# Altium PCB EST_MainV20.PcbDoc (part 8 of 8)
Units mm, origin at the board's own origin, x right, y up, seen from the top; angles counter-clockwise.
Board outline 69.72 x 115.32 mm, 2 copper layers (Top Layer, Bottom Layer); 330 components, 239 nets, 1066 pads, 416 vias.
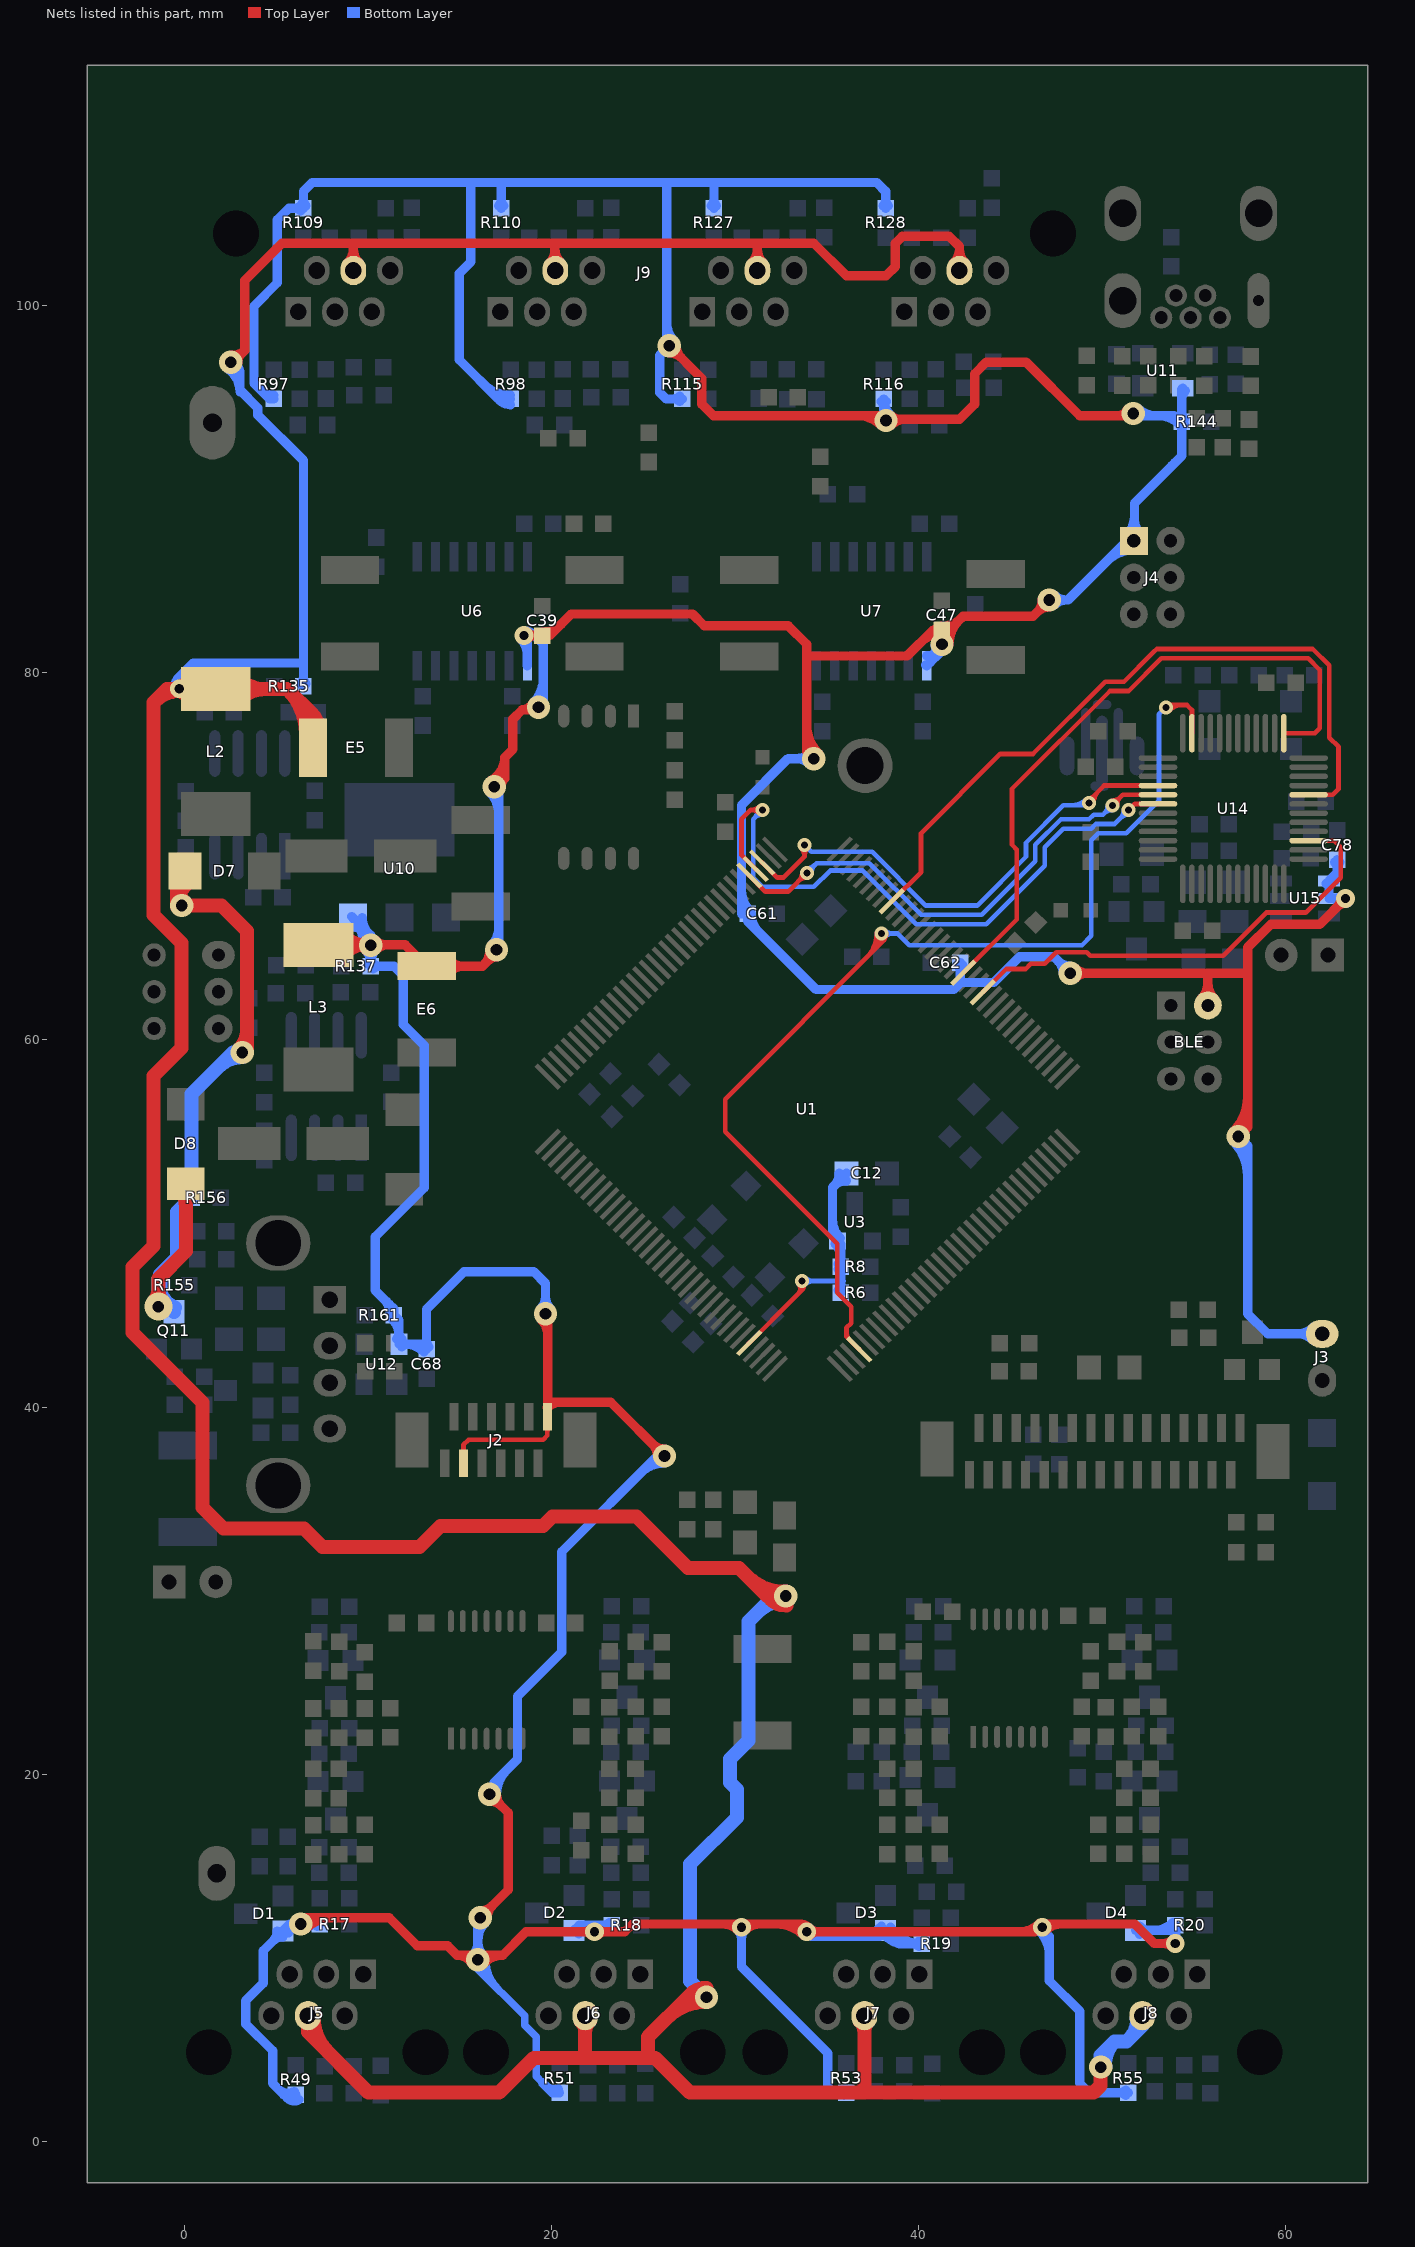
[diagram p8: the nets of this part, all layers, seen from the top]

## Via types
v1: diameter 0.762, hole 0.381, Top Layer to Bottom Layer, 258 vias
v2: diameter 1.27, hole 0.635, Top Layer to Bottom Layer, 91 vias
v3: diameter 1.016, hole 0.508, Top Layer to Bottom Layer, 66 vias
v4: diameter 1.524, hole 0.635, Top Layer to Bottom Layer, 1 vias

## Nets (pads, with @x,y where several pads share a name; then routed paths per layer and width w, separated by ;. In a path a pad name is that pad's centre, name@x,y a point inside that pad or via, vN(x,y) a via of type N, cw(c..) or ccw(c..) an arc to the next point about the centre after c; other vN are vias at no path point) (continued)
VCC: BLE.2 C39.1 C47.1 C61.2 C62.2 C68.1 C78.2 D1.3 D2.3 D3.3 D4.3 E6.1 J2.1 J2.10 J3.1 J4.1 L3.2 R17.1 R18.1 R19.1 R20.1 R49.1 R51.1 R53.1 R55.1 R97.2 R98.2 R109.1 R110.1 R115.2 R116.2 R127.1 R128.1 R137.2 R144.2 R161.1 U6.1 U7.1 U10.3 U11.4 U12.4 U15.4 U15.5 | length 639.1
  Top Layer w0.254: J2.10@15.128,37.519 ccw(c14.918,37.729) 15.215,37.729 ccw(c15.512,37.729) J2.10@15.302,37.519 ; J2.10@15.215,36.932 15.215,37.948 15.494,38.227 19.558,38.227 19.787,38.456 J2.1@19.787,39.472 ; J2.1@19.7,38.885 cw(c19.49,38.675) 19.787,38.675 cw(c20.084,38.675) J2.1@19.874,38.885
  Top Layer w0.406: J2.1@19.787,38.964 J2.1@19.787,39.472 19.787,40.234 19.812,40.259
  Top Layer w0.508: v2(6.35,11.855) 6.687,12.192 11.176,12.192 12.7,10.668 14.351,10.668 14.859,10.16 ; v2@6.619,11.586 cw(c8.083,10.122) 8.083,12.192 ; L3.2@7.315,65.173 12.043,65.173 E6.1@13.208,64.008 16.256,64.008 17.018,64.77 v2(17.018,64.897) ; L3.2@8.684,64.504 cw(c10.299,62.889) 10.299,65.173 cw(c10.299,67.457) L3.2@8.684,65.842 ; L3.2@9.187,65.173 cw(c9.187,64.179) v2@9.89,64.882 ; 9.293,65.173 ccw(c9.293,66.018) v2@9.89,65.42 ; v2@10.429,64.882 cw(c11.132,64.179) 11.132,65.173 ; v2@10.429,65.42 ccw(c11.027,66.018) 11.027,65.173 ; 12.172,65.044 cw(c11.496,64.367) E6.1@12.382,64.008 ; E6.1@14.393,63.649 cw(c15.26,62.782) 15.26,64.008 cw(c15.26,65.234) E6.1@14.393,64.367 ; v2@15.679,9.705 ccw(c14.859,9.195) 14.859,10.16 ; v2(16.129,12.192) 17.653,13.716 17.653,17.907 v2@16.891,18.669 ; v2@16.129,12.573 ccw(c16.129,13.493) 16.779,12.842 ccw(c17.43,12.192) v2@16.51,12.192 ; v2@16.295,9.663 cw(c17.355,8.782) 17.355,10.16 ; 16.32,64.072 ccw(c15.551,64.841) v2@16.637,64.882 ; 16.584,64.336 cw(c17.018,63.903) v2@17.018,64.516 ; v2@16.637,18.542 cw(c16.637,17.622) 17.287,18.273 cw(c17.938,18.923) v2@17.018,18.923 ; v2@16.712,74.123 ccw(c16.044,75.374) 17.463,75.374 ; v2@16.951,73.675 ccw(c16.496,74.528) 17.462,74.528 ; v2@17.018,73.787 17.462,74.231 17.462,75.374 ; v3(18.514,82.014) C39.1@19.503,82.014 19.911,82.014 21.082,83.185 27.686,83.185 28.321,82.55 32.893,82.55 33.909,81.534 33.909,80.899 ; v3@18.693,81.834 cw(c19.127,81.4) 19.127,82.014 cw(c19.127,82.627) v3@18.693,82.193 ; v2@18.976,78.298 cw(c18.415,78.629) 18.415,77.978 ; v2@19.304,77.978 18.415,77.978 ; C39.1@19.365,81.875 ccw(c19.03,81.54) 19.03,82.014 ccw(c19.03,82.487) C39.1@19.365,82.152 ; v2@19.416,44.816 cw(c18.459,43.859) 19.812,43.859 ; C39.1@19.503,82.21 ccw(c19.503,83.666) 20.533,82.636 ; v2@19.558,44.958 19.812,44.704 19.812,40.259 23.241,40.259 v2(26.161,37.339) ; J2.1@19.784,39.974 cw(c20.471,39.287) 20.471,40.259 ; v3@22.172,11.25 ccw(c21.739,10.817) 21.739,11.43 ccw(c21.739,12.043) v3@22.172,11.61 ; v3@22.532,11.25 cw(c22.965,10.817) 22.965,11.43 cw(c22.965,12.043) v3@22.532,11.61 ; v2@25.78,37.339 ccw(c24.86,37.339) 25.51,37.99 ccw(c26.161,38.64) v2@26.161,37.72 ; v2@26.416,97.409 cw(c26.416,96.489) 27.066,97.14 cw(c27.717,97.79) v2@26.797,97.79 ; v2(26.416,97.79) 28.194,96.012 28.194,94.615 28.829,93.98 37.973,93.98 v2@38.164,93.789 ; 29.327,11.855 cw(c29.327,10.658) v3@30.173,11.504 ; v3@30.226,11.684 v3@30.353,11.557 ; v3@30.533,11.504 cw(c31.379,10.658) 31.379,11.855 ; 32.27,11.855 cw(c32.27,9.791) v3@33.729,11.25 ; 33.496,11.855 cw(c33.496,11.017) 34.089,11.61 ccw(c34.522,12.043) 34.522,11.43 ccw(c34.522,10.817) v3@34.089,11.25 ; 33.909,75.924 ccw(c34.903,75.924) v2@34.2,75.221 ; 33.909,77.151 ccw(c36.13,77.151) v2@34.559,75.58 ; 33.909,80.264 33.909,79.883 ; v2(34.29,75.311) 33.909,75.692 33.909,79.883 ; 34.544,80.899 34.925,80.899 ; 36.694,93.98 cw(c36.694,92.193) v2@37.958,93.457 ; v2@38.227,93.789 42.227,93.789 43.053,94.615 43.053,96.266 43.688,96.901 45.847,96.901 48.768,93.98 50.8,93.98 ; v2@38.496,93.457 cw(c39.299,92.654) 39.299,93.789 ; v2@38.496,93.995 ccw(c38.994,94.493) 38.994,93.789 ; 40.132,81.661 cw(c41.246,80.548) C47.1@41.246,82.122 ; 40.561,82.09 cw(c40.89,81.762) C47.1@41.14,82.153 ; v2@41.049,81.84 ccw(c40.717,82.289) C47.1@41.275,82.289 ; C47.1@41.103,82.183 ccw(c40.789,81.886) 40.789,82.318 ; C47.1@41.103,82.453 cw(c40.789,82.751) 40.789,82.318 ; C47.1@41.107,82.18 cw(c40.701,81.774) v2@41.275,81.774 ; C47.1@41.246,82.514 ccw(c41.246,84.032) 42.319,82.959 ; v2(41.275,81.534) C47.1@41.275,82.289 ; C47.1@41.304,82.26 cw(c40.859,81.815) v2@41.38,81.463 ; v2@41.501,81.84 cw(c41.833,82.289) C47.1@41.275,82.289 ; v2@41.603,81.727 cw(c42.022,81.974) C47.1@41.678,82.318 ; v2@41.656,81.534 cw(c43.496,81.534) 42.195,82.835 ; 45.51,11.43 ccw(c45.51,12.91) v3@46.556,11.864 ; v2@46.736,83.947 cw(c45.816,83.947) 46.467,83.297 cw(c47.117,82.646) v2@47.117,83.566 ; v3@46.916,11.504 cw(c47.762,10.658) 47.762,11.855 ; v2(47.117,83.947) 46.228,83.058 42.418,83.058 C47.1@41.678,82.318 ; v2(48.26,63.627) 57.912,63.627 ; v2@48.529,63.358 cw(c49.18,62.707) 49.18,63.627 cw(c49.18,64.547) v2@48.529,63.896 ; 49.149,93.98 50.8,93.98 ; v2@51.361,94.3 cw(c50.8,94.631) 50.8,93.98 ; v2@51.562,93.98 50.8,93.98 ; v3@53.795,10.615 ccw(c53.362,10.182) 53.362,10.795 ccw(c53.362,11.408) v3@53.795,10.975 ; v3(53.975,10.795) 52.832,10.795 51.772,11.855 46.736,11.855 46.311,11.43 v3(33.909,11.43) 33.484,11.855 24.428,11.855 24.003,11.43 v3(22.352,11.43) 18.625,11.43 17.355,10.16 ; BLE.2@55.387,62.234 ccw(c54.52,63.101) 55.746,63.101 ccw(c56.973,63.101) BLE.2@56.106,62.234 ; BLE.2@55.746,61.874 55.746,63.62 ; v2@57.135,55.006 ccw(c55.258,56.883) 57.912,56.883 ; v2(57.404,54.737) 57.912,55.245 57.912,63.627 ; v2@57.494,54.647 ccw(c56.484,55.657) 57.912,55.657 ; v3@62.992,67.691 cw(c62.379,67.691) 62.812,67.257 cw(c63.246,66.824) v3@63.246,67.437 ; v3(63.246,67.691) 61.849,66.294 59.182,66.294 57.912,65.024 57.912,63.627 ; 14.859,10.16 17.355,10.16 ; 17.462,75.374 17.907,75.819 17.907,77.47 18.415,77.978 ; 33.909,79.883 33.909,80.899 ; 33.909,80.899 34.925,80.899 ; 34.925,80.899 39.37,80.899 40.789,82.318 ; 40.789,82.318 C47.1@41.246,82.318 ; C47.1@41.246,82.318 C47.1@41.678,82.318 ; C47.1@41.246,82.318 C47.1@41.275,82.289
  Bottom Layer w0.406: v2@16.002,10.16 v2(16.002,9.906) 16.002,9.398 18.542,6.858 18.542,6.35 19.177,5.715 19.177,3.556 19.518,3.215 ; v2@16.027,9.906 ccw(c17.315,9.906) 16.405,8.995 ; v2@16.434,9.906 ccw(c18.703,9.906) 17.098,8.302
  Bottom Layer w0.508: 4.195,95.373 ccw(c4.877,96.056) R97.2@4.877,95.091 ; R97.2@4.877,94.895 4.673,94.895 3.81,95.758 3.81,99.949 5.08,101.219 5.08,103.505 ; D1.3@5.072,11.474 cw(c4.306,11.474) 4.848,10.932 cw(c5.39,10.39) D1.3@5.39,11.156 ; 5.08,104.394 5.08,103.505 ; 5.156,2.845 ccw(c5.648,3.337) R49.1@5.997,2.735 ; 5.623,2.378 ccw(c5.991,2.746) R49.1@6.252,2.295 ; D1.3@5.692,11.376 cw(c6.35,11.164) v2(6.35,11.855) ; R49.1@5.957,2.427 ccw(c5.622,2.092) 5.622,2.565 ccw(c5.622,3.039) R49.1@5.957,2.704 ; R49.1@6.096,2.565 5.436,2.565 4.826,3.175 4.826,4.953 3.365,6.413 3.365,7.683 4.318,8.636 4.318,10.402 D1.3@5.39,11.474 5.771,11.855 v2(6.35,11.855) ; R109.1@6.364,105.144 ccw(c6.03,104.81) 6.03,105.283 ccw(c6.03,105.756) 6.364,105.422 ccw(c6.03,105.756) 6.503,105.756 ccw(c6.976,105.756) R109.1@6.641,105.422 ; v2@6.619,11.586 cw(c7.27,10.935) 7.27,11.855 cw(c7.27,12.775) v2@6.619,12.125 ; R17.1@7.258,11.717 ccw(c6.923,11.382) 6.923,11.855 ccw(c6.923,12.328) R17.1@7.258,11.994 ; R17.1@7.397,11.855 v2(6.35,11.855) ; U10.3@9.132,66.712 cw(c7.571,65.151) v2@9.779,65.151 ; U10.3@9.195,66.142 cw(c9.195,64.915) 10.062,65.782 cw(c10.929,66.65) U10.3@9.703,66.65 ; U10.3@9.195,66.65 10.16,65.685 v2(10.16,65.151) R137.2@10.16,64.008 11.43,64.008 11.938,63.5 11.938,60.833 13.081,59.69 13.081,51.943 10.414,49.276 10.414,46.355 11.176,45.593 11.43,45.339 R161.1@11.43,45.008 11.709,44.729 U12.4@11.709,43.434 C68.1@13.204,43.434 ; v2@9.89,64.882 cw(c9.24,64.231) 10.16,64.231 cw(c11.08,64.231) v2@10.429,64.882 ; 9.999,65.845 cw(c9.305,65.151) v2@10.287,65.151 ; R137.2@10.021,64.147 ccw(c9.687,64.482) 10.16,64.482 ccw(c10.633,64.482) 10.298,64.147 ccw(c10.633,64.482) 10.633,64.008 ccw(c10.633,63.535) R137.2@10.298,63.87 ; 10.862,45.907 cw(c9.963,45.008) R161.1@11.234,45.008 ; R161.1@11.292,44.87 cw(c10.283,43.861) U12.4@11.709,43.861 ; U12.4@11.566,43.705 ccw(c11.219,44.052) 11.709,44.052 ccw(c12.2,44.052) U12.4@11.853,43.705 ; U12.4@11.853,43.29 cw(c12.2,42.943) 12.2,43.434 cw(c12.2,43.925) U12.4@11.853,43.578 ; U12.4@12.019,43.434 cw(c12.019,41.954) C68.1@13.065,43 ; C68.1@13.065,43.278 ccw(c12.731,43.612) 13.204,43.612 ccw(c13.677,43.612) C68.1@13.343,43.278 ; C68.1@13.204,43.139 C68.1@13.204,43.434 ; v2@15.733,10.175 ccw(c15.082,10.826) 16.002,10.826 ccw(c16.922,10.826) v2@16.271,10.175 ; v2(16.002,9.906) v2@16.002,12.065 ; 16.002,10.966 cw(c17.355,10.966) v2@16.398,11.923 ; v2(16.129,12.192) v2@16.256,12.319 ; 16.317,95.697 ccw(c17.78,97.16) R98.2@17.78,95.091 ; v2@16.622,73.518 cw(c15.358,72.254) 17.145,72.254 ; v2@16.749,65.166 ccw(c15.792,66.123) 17.145,66.123 ; v2@16.891,18.669 16.891,19.558 18.161,20.828 18.161,24.257 20.574,26.67 20.574,32.131 25.782,37.339 v2(26.161,37.339) ; v2@17.018,18.923 cw(c18.858,18.923) 17.557,20.224 ; v2(17.018,64.897) 17.145,65.024 17.145,73.66 v2@17.018,73.787 ; R110.1@17.134,105.422 ccw(c16.799,105.756) 17.272,105.756 ccw(c17.746,105.756) R110.1@17.411,105.422 ; 17.185,94.829 ccw(c17.78,95.425) R98.2@17.78,94.583 ; R110.1@17.272,105.283 17.272,106.553 ; R98.2@17.642,94.756 ccw(c17.307,94.421) 17.307,94.895 ccw(c17.307,95.368) R98.2@17.642,95.033 ; R98.2@17.78,94.895 17.119,94.895 14.986,97.028 14.986,101.727 15.621,102.362 15.621,106.68 ; v3@18.334,81.834 cw(c17.464,80.964) U6.1@18.694,80.964 ; v3@18.502,82.267 cw(c18.535,81.57) 19.028,82.064 ; v3(18.514,82.014) 19.078,82.014 19.558,81.534 v2@19.558,77.978 ; U6.1@18.694,80.366 v3@18.694,81.833 ; v2@19.035,78.374 ccw(c17.771,79.638) 19.558,79.638 ; v2@19.416,45.354 ccw(c18.765,46.005) 19.685,46.005 ccw(c20.605,46.005) v2@19.954,45.354 ; 19.518,3.215 20.066,2.667 R51.1@20.447,2.667 ; v2(19.685,45.085) 19.685,46.736 19.05,47.371 15.621,47.371 15.24,47.371 13.204,45.335 C68.1@13.204,43.434 ; 19.708,3.025 ccw(c20.191,3.507) R51.1@20.389,2.854 ; D2.3@21.234,11.506 D2.3@21.514,11.786 ; D2.3@21.498,11.33 cw(c22.352,10.759) v3@22.352,11.786 ; v3@22.11,11.352 ccw(c21.514,11.16) D2.3@21.514,11.786 ; v3@22.584,11.327 cw(c23.292,11.011) R18.1@23.292,11.786 v3@22.352,11.786 ; R18.1@23.153,11.647 ccw(c22.819,11.313) 22.819,11.786 ccw(c22.819,12.259) R18.1@23.153,11.925 ; 24.865,36.422 cw(c26.161,35.126) v2@26.161,36.958 ; 26.289,99.016 ccw(c27.642,99.016) v2@26.685,98.059 ; 26.289,106.426 26.289,97.917 v2(26.416,97.79) 25.908,97.282 25.908,95.25 26.263,94.895 R115.2@27.128,94.895 ; R115.2@26.989,94.756 ccw(c26.654,94.421) 26.654,94.895 ccw(c26.654,95.368) R115.2@26.989,95.033 ; R127.1@28.716,105.422 ccw(c28.382,105.756) 28.855,105.756 ccw(c29.328,105.756) R127.1@28.993,105.422 ; R127.1@28.855,105.283 28.855,106.654 ; v3@30.173,11.504 cw(c29.74,11.071) 30.353,11.071 cw(c30.966,11.071) v3@30.533,11.504 ; v3@30.353,11.557 30.353,9.525 35.052,4.826 35.052,2.921 35.306,2.667 R53.1@36.068,2.667 ; C61.2@30.353,66.857 30.353,69.088 ; 30.353,68.135 ccw(c31.964,68.135) C61.2@30.825,66.995 ; 30.353,69.723 30.353,69.088 ; C61.2@30.686,66.857 30.686,66.469 34.417,62.738 41.91,62.738 42.262,63.09 42.262,63.119 ; C61.2@30.882,66.857 ccw(c32.293,66.857) 31.295,65.86 ; v3(33.909,11.43) 34.163,11.176 37.871,11.176 D3.3@38.202,11.506 38.938,10.77 R19.1@40.157,10.77 cw(c40.157,12.794) D3.3@38.467,11.681 ; v2@33.909,75.311 32.893,75.311 30.353,72.771 30.353,69.088 ; v2@34.021,75.042 ccw(c33.37,74.391) 33.37,75.311 ccw(c33.37,76.231) v2@34.021,75.58 ; v3@34.089,11.61 ccw(c35.135,12.656) 35.135,11.176 ; R53.1@35.929,2.528 ccw(c35.594,2.194) 35.594,2.667 ccw(c35.594,3.14) R53.1@35.929,2.806 ; 36.638,11.176 ccw(c36.638,13.07) D3.3@37.977,11.731 ; R116.2@37.962,94.756 cw(c37.627,94.421) 38.1,94.421 cw(c38.574,94.421) R116.2@38.239,94.756 ; D3.3@38.043,11.401 ccw(c39.214,12.173) 39.214,10.77 ; R128.1@38.063,105.422 ccw(c37.729,105.756) 38.202,105.756 ccw(c38.675,105.756) R128.1@38.341,105.422 ; v2@38.1,93.853 R116.2@38.1,94.895 ccw(c39.318,94.895) v2@38.487,94.004 ; D3.3@38.202,11.189 cw(c38.202,10.422) 38.744,10.964 cw(c39.286,11.506) D3.3@38.519,11.506 ; R128.1@38.202,105.283 38.202,106.197 37.719,106.68 15.621,106.68 ; R19.1@40.019,10.631 ccw(c39.684,10.297) 39.684,10.77 ccw(c39.684,11.243) R19.1@40.019,10.909 ; U7.1@40.378,80.407 ccw(c40.4,80.593) U7.1@40.532,80.46 ; U7.1@40.437,80.366 v2@41.275,81.204 ; U7.1@40.436,80.912 ccw(c40.553,81.925) v2@41.275,81.204 ; U7.1@40.602,80.531 ccw(c39.846,81.287) v2@40.9,81.469 ; v2@41.25,81.509 v2(41.275,81.534) v2@41.275,81.204 ; C62.2@42.124,64.069 cw(c41.789,63.734) 42.262,63.734 cw(c42.736,63.734) C62.2@42.401,64.069 ; C62.2@42.262,64.207 42.262,63.119 ; v3@46.556,11.504 cw(c45.203,10.151) 47.117,10.151 ; v3@46.736,11.557 47.117,11.176 47.117,8.763 48.768,7.112 48.768,3.175 49.276,2.667 R55.1@51.409,2.667 ; v2(47.117,83.947) 48.133,83.947 51.753,87.566 51.753,89.218 53.785,91.249 ; v2@47.386,83.678 cw(c48.037,83.027) 48.037,83.947 cw(c48.037,84.867) v2@47.386,84.216 ; v2@47.879,63.627 ccw(c46.959,63.627) 47.61,64.277 ccw(c48.26,64.928) v2@48.26,64.008 ; v2(48.26,63.627) 47.371,64.516 45.488,64.516 44.091,63.119 42.262,63.119 ; 50.24,86.054 cw(c51.714,84.58) J4.1@51.714,86.665 ; R55.1@51.271,2.528 ccw(c50.936,2.194) 50.936,2.667 ccw(c50.936,3.14) R55.1@51.271,2.806 ; J4.1@51.355,87.532 ccw(c50.396,88.491) 51.753,88.491 ; v2@51.689,93.98 53.9,93.98 54.228,93.652 R144.2@54.335,93.652 ; 51.753,88.307 ccw(c52.849,88.307) J4.1@52.074,87.532 ; D4.3@51.816,11.506 53.695,11.506 R20.1@53.975,11.786 v3(53.975,10.795) ; v2@51.958,94.376 ccw(c52.915,95.333) 52.915,93.98 ; D4.3@52.041,11.282 cw(c52.583,10.74) 52.583,11.506 cw(c52.583,12.273) D4.3@52.041,11.731 ; 52.826,11.506 ccw(c52.826,12.935) R20.1@53.836,11.925 ; 53.071,93.98 cw(c53.071,92.388) 54.196,93.514 cw(c53.862,93.179) 54.335,93.179 cw(c54.808,93.179) R144.2@54.473,93.514 ; v3@53.795,10.975 ccw(c53.362,11.408) 53.975,11.408 ccw(c54.588,11.408) v3@54.155,10.975 ; R20.1@53.836,11.647 cw(c53.502,11.313) 53.975,11.313 cw(c54.448,11.313) R20.1@54.114,11.647 ; 53.954,91.419 53.785,91.249 ; R144.2@54.196,93.791 ccw(c53.862,94.126) 54.335,94.126 ccw(c54.808,94.126) R144.2@54.473,93.791 ; R144.2@54.281,93.599 R144.2@54.335,93.652 ; R144.2@54.335,93.856 54.335,95.432 U11.4@54.381,95.479 ; 54.335,94.876 cw(c54.984,94.876) U11.4@54.525,95.335 ; v2@57.135,54.468 cw(c55.258,52.591) 57.912,52.591 ; v2(57.404,54.737) 57.912,54.229 57.912,48.768 ; v2@57.494,54.827 cw(c56.484,53.817) 57.912,53.817 ; 57.912,49.479 57.912,48.768 ; J3.1@61.49,43.634 ccw(c60.623,42.766) 60.623,43.993 ccw(c60.623,45.219) J3.1@61.49,44.352 ; J3.1@61.874,43.993 59.004,43.993 57.912,45.085 57.912,48.768 ; U15.4@62.203,68.503 cw(c62.215,68.507) U15.4@62.206,68.517 ; U15.5@62.608,67.701 cw(c62.608,67.053) v3@63.066,67.511 ; U15.4@62.608,68.684 ccw(c62.182,69.11) 62.785,69.11 ; U15.4@62.609,68.684 ccw(c62.217,69.095) 62.785,69.095 ; C78.2@62.646,69.664 cw(c62.312,69.329) 62.785,69.329 cw(c63.258,69.329) C78.2@62.923,69.664 ; U15.5@62.651,67.656 cw(c62.823,66.927) v3@63.353,67.457 ; U15.5@62.652,67.657 cw(c62.831,66.956) v3@63.343,67.467 ; U15.5@62.657,67.701 ccw(c62.657,68.28) v3@63.066,67.871 ; U15.4@62.684,68.666 cw(c63.08,68.8) 62.785,69.095 ; C78.2@62.785,69.802 62.785,69.095 ; v3@63.119,67.691 63.109,67.701 U15.5@62.341,67.701 U15.4@62.341,68.651 62.785,69.095 ; 5.08,103.505 5.08,104.648 5.715,105.283 R109.1@6.503,105.283 6.503,106.198 6.985,106.68 15.621,106.68 ; D2.3@21.514,11.786 v3@22.352,11.786 ; 53.785,91.249 54.335,91.8 R144.2@54.335,93.652 ; 11.011,45.758 cw(c10.435,45.182) 11.237,45.042 ccw(c10.435,45.182) 11.011,45.758
  other v2: 16.637,18.923 16.891,73.787 19.304,78.105 38.227,93.726 51.689,94.107
  other v3: 30.353,11.684 46.736,11.684
VCCEXT: E5.1 J5.4 J6.4 J7.4 J8.4 J9.4 J9.10 J9.16 J9.22 L2.2 R135.2 | length 316.3
  Top Layer w0.508: v2(2.54,96.901) 2.667,96.901 3.302,97.536 ; v2@2.58,97.28 ccw(c2.672,98.166) 3.302,97.536 ; v2@2.921,96.901 cw(c3.534,96.901) 3.101,97.335 ; 5.052,103.096 4.826,102.87 ; J9.4@8.906,102.305 ccw(c8.144,103.066) 9.221,103.066 ccw(c10.298,103.066) J9.4@9.536,102.305 ; J9.4@9.221,101.89 9.221,103.328 ; J9.10@19.906,102.305 ccw(c19.212,102.999) 20.193,102.999 ; J9.10@20.193,101.727 20.193,103.087 ccw(c21.255,103.087) J9.10@20.527,102.314 ; J9.16@30.906,102.305 ccw(c30.144,103.066) 31.221,103.066 ccw(c32.298,103.066) J9.16@31.536,102.305 ; J9.16@31.221,101.89 31.221,103.357 ; J9.22@41.906,102.305 ccw(c41.144,103.066) 42.221,103.066 ccw(c43.298,103.066) J9.22@42.536,102.305 ; J9.22@42.221,101.89 42.221,103.194 41.656,103.759 39.116,103.759 38.735,103.378 38.735,102.108 38.227,101.6 36.068,101.6 34.29,103.378 5.334,103.378 4.826,102.87 ; 3.302,97.536 3.302,101.346 4.826,102.87
  Top Layer w0.762: -1.555,78.455 cw(c-0.254,77.154) v3@-0.254,78.994 ; -1.235,78.775 cw(c-0.58,78.119) v3@-0.293,79 ; L2.2@0.441,78.52 ccw(c-0.918,77.192) -0.918,79.092 ; L2.2@0.441,79.664 cw(c-0.918,80.992) -0.918,79.092 ; 1.016,37.084 1.016,36.068 ; L2.2@3.006,78.513 cw(c4.404,77.115) 4.404,79.092 cw(c4.404,81.069) L2.2@3.006,79.671 ; 5.669,79.04 cw(c3.349,76.721) E5.1@6.629,76.721 ; E5.1@6.741,76.99 ccw(c6.091,77.641) 7.01,77.641 ccw(c7.93,77.641) E5.1@7.28,76.99 ; J5.4@6.746,6.87 6.746,5.969 10.048,2.667 17.145,2.667 19.05,4.572 21.846,4.572 ; 6.969,77.74 cw(c5.95,76.721) E5.1@7.391,76.721 ; E5.1@7.01,75.895 7.01,77.699 5.617,79.092 3.937,79.092 ; J5.4@7.065,6.77 ccw(c9.768,6.77) 7.857,4.858 ; 21.465,4.572 21.846,4.572 ; J6.4@21.62,6.544 cw(c21.076,6) 21.846,6 cw(c22.616,6) J6.4@22.072,6.544 ; J6.4@21.844,6.868 J6.4@21.846,6.87 21.846,4.572 ; 26.28,6.722 cw(c28.448,4.554) v2@28.448,7.62 ; 26.924,7.366 cw(c27.839,6.451) v2@28.348,7.641 ; 27.581,8.023 cw(c28.448,7.156) v2@28.448,8.382 ; v2(28.448,7.874) 27.432,7.874 25.273,5.715 25.273,4.572 ; 30.734,30.734 ccw(c32.587,32.587) v2@32.75,29.972 ; 31.928,29.54 ccw(c32.727,30.339) v2@32.798,29.211 ; v2(32.766,29.718) 31.75,29.718 30.226,31.242 27.432,31.242 24.638,34.036 20.066,34.036 19.558,33.528 13.97,33.528 12.827,32.385 7.546,32.385 6.53,33.401 2.159,33.401 1.016,34.544 1.016,36.068 ; J7.4@36.82,6.544 cw(c36.276,6) 37.046,6 cw(c37.816,6) J7.4@37.272,6.544 ; 37.046,2.705 37.046,5.08 ; 37.046,3.467 37.046,5.08 ; J7.4@37.046,6.87 37.046,5.08 ; v2(49.911,4.064) 49.911,3.048 49.53,2.667 27.559,2.667 25.654,4.572 25.273,4.572 ; -0.918,79.092 -1.651,78.359 -1.651,66.802 -0.127,65.278 -0.127,59.563 -1.651,58.039 -1.651,48.768 -2.794,47.625 -2.794,44.069 1.016,40.259 1.016,36.068 ; -0.918,79.092 L2.2@1.727,79.092 3.937,79.092 ; 3.937,79.092 cw(c3.937,80.074) 3.114,79.539 ccw(c3.937,80.074) 3.937,79.092 ; 3.937,79.092 ccw(c3.937,78.11) 3.114,78.645 cw(c3.937,78.11) 3.937,79.092 ; 21.846,4.572 25.273,4.572
  Bottom Layer w0.508: v3@-0.507,79.101 cw(c0.302,79.164) -0.272,79.738 ; v3@-0.434,79.301 ccw(c-0.867,79.734) -0.254,79.734 ccw(c0.359,79.734) v3@-0.074,79.301 ; v3@-0.254,79.326 -0.254,79.756 0.508,80.518 ; v3@-0.001,79.141 cw(c1.749,79.277) 0.508,80.518 ; v2@2.338,96.578 cw(c1.533,95.295) 3.048,95.295 ; v2(2.54,96.901) 3.048,96.393 3.048,95.377 4.021,94.404 4.021,94.023 6.502,91.542 6.502,80.518 ; v2@2.607,97.009 cw(c2.109,96.213) 3.048,96.213 ; R135.2@6.364,79.387 ccw(c6.029,79.722) 6.502,79.722 ccw(c6.975,79.722) R135.2@6.641,79.387 ; R135.2@6.502,79.248 6.502,80.518 ; 0.508,80.518 6.502,80.518
  Bottom Layer w0.762: v2(28.448,7.874) 27.559,8.763 27.559,15.113 30.099,17.653 30.099,19.177 29.718,19.558 29.718,20.828 30.734,21.844 30.734,23.622 ; 30.734,22.225 30.734,23.622 ; 30.734,25.527 30.734,25.146 ; 31.248,28.835 cw(c32.766,27.318) v2@32.766,29.464 ; v2(32.766,29.718) 32.131,29.718 30.734,28.321 30.734,25.146 ; v2(49.911,4.064) 49.911,4.699 50.673,5.461 ; v2@50.164,4.084 cw(c51.914,4.22) 50.673,5.461 ; 51.528,5.681 ccw(c50.686,6.523) J8.4@51.861,6.718 ; J8.4@52.176,6.87 52.176,6.329 51.308,5.461 50.673,5.461 ; 30.734,23.622 30.734,25.146
  other v3: -0.254,79.121
VIN: D7.1 D8.1 Q11.3 R155.2 R156.2 | length 53.1
  Top Layer w0.762: v4@-1.666,45.735 ccw(c-2.317,46.386) -1.397,46.386 ccw(c-0.477,46.386) v4@-1.128,45.735 ; v4(-1.397,45.466) -1.397,46.99 0.102,48.489 D8.1@0.102,52.172 ; v2@-0.381,67.258 cw(c1.314,67.258) D7.1@0.342,68.646 ; v2@-0.381,67.31 D7.1@-0.381,68.885 ; D7.1@-0.381,68.536 ccw(c1.099,68.536) v2@0.053,67.49 ; D8.1@-0.258,51.812 cw(c-1.125,50.945) 0.102,50.945 cw(c1.328,50.945) D8.1@0.461,51.812 ; v2(-0.127,67.31) 2.032,67.31 3.429,65.913 3.429,61.849 ; v2(3.175,59.309) 3.429,59.563 3.429,61.849 ; 3.429,59.944 3.429,61.849 ; v2@2.995,59.489 ccw(c1.949,60.535) 3.429,60.535 cw(c1.949,60.535) v2@2.995,59.489
  Bottom Layer w0.762: v4@-1.666,45.735 ccw(c-2.501,46.57) R155.2@-1.321,46.57 ; R155.2@-1.253,46.623 ccw(c-0.014,46.417) Q11.3@-0.902,45.529 ; R155.2@-1.252,46.634 cw(c0.305,46.634) -0.796,47.735 ; Q11.3@-0.559,45.187 -1.321,45.948 R155.2@-1.321,46.634 ; Q11.3@-0.491,45.428 cw(c-0.029,46.634) R155.2@-1.321,46.634 ; 1.874,58.516 cw(c3.175,57.215) v2@3.175,59.055 ; v2(3.175,59.309) 2.667,59.309 0.407,57.049 R156.2@0.407,51.409 -0.381,50.622 -0.381,48.149 -1.321,47.21 R155.2@-1.321,46.634
VREF: C12.2 R6.2 R8.2 U1.32 U3.3 | length 23.6
  Top Layer w0.254: U1.32@30.765,43.492 33.197,45.924 ; 33.438,46.165 ccw(c33.159,46.444) v1@33.461,46.699 ; 33.502,46.228 33.197,45.924 ; 33.634,46.36 ccw(c33.371,46.623) v1(33.655,46.863) 33.655,46.381 33.197,45.924
  Bottom Layer w0.254: v1(33.655,46.863) 35.763,46.863 35.916,46.863 ; v1@33.835,46.683 cw(c34.268,46.25) 34.268,46.863 cw(c34.268,47.476) v1@33.835,47.043
  Bottom Layer w0.508: 35.306,50.213 ccw(c36.751,50.213) U3.3@35.729,49.191 ; U3.3@35.442,48.904 cw(c34.665,48.127) 35.763,48.127 ; R8.2@35.625,47.511 cw(c35.29,47.177) 35.763,47.177 cw(c36.237,47.177) R8.2@35.902,47.511 ; R8.2@35.625,47.789 ccw(c35.29,48.123) 35.763,48.123 ccw(c36.237,48.123) R8.2@35.902,47.789 ; C12.2@35.68,52.729 cw(c34.724,52.729) 35.4,52.053 cw(c36.076,51.377) C12.2@36.076,52.333 ; R6.2@35.763,46.228 35.763,46.863 R8.2@35.763,47.65 35.763,48.869 35.306,49.327 35.306,51.958 C12.2@36.076,52.729 ; R6.2@35.625,46.366 ccw(c35.29,46.701) 35.763,46.701 ; R6.2@35.625,46.366 ccw(c35.29,46.701) 35.763,46.701 ; R6.2@35.625,46.366 ccw(c35.29,46.701) 35.763,46.701 ; 35.763,46.701 ccw(c36.237,46.701) R6.2@35.902,46.366 ; 35.763,46.701 ccw(c36.237,46.701) R6.2@35.902,46.366 ; 35.763,46.701 ccw(c36.237,46.701) R6.2@35.902,46.366
VS_CS: U1.40 U14.23 | length 65
  Top Layer w0.254: 36.068,44.074 ccw(c36.618,44.074) U1.40@36.229,43.685 ; U1.40@36.776,43.138 36.068,43.846 36.068,44.323 36.322,44.577 36.322,45.466 35.56,46.228 35.56,48.895 29.464,54.991 29.464,56.769 37.973,65.278 ; 37.18,64.485 ccw(c35.879,65.786) v1@37.719,65.786 ; 37.614,64.919 ccw(c36.747,65.786) v1(37.973,65.786) 37.973,65.278 ; v1@37.821,65.583 cw(c37.592,65.278) 37.973,65.278 ; 38.047,65.352 ccw(c37.614,65.786) v1@38.227,65.786 ; v1@38.125,65.583 ccw(c38.354,65.278) 37.973,65.278 ; v1(53.467,78.105) 53.594,78.232 54.61,78.232 54.883,77.959 U14.23@54.883,76.693 ; v1@53.647,77.925 cw(c54.387,77.185) 54.387,78.232
  Bottom Layer w0.254: v1(37.973,65.786) 38.862,65.786 39.497,65.151 48.895,65.151 49.403,65.659 49.403,70.866 49.784,71.247 51.308,71.247 53.086,73.025 53.086,77.724 v1(53.467,78.105) ; v1@38.153,65.606 cw(c38.586,65.173) 38.586,65.786 cw(c38.586,66.399) v1@38.153,65.966
VS_DREQ: U1.89 U14.13 | length 37.4
  Top Layer w0.254: U1.89@42.433,63.644 45.339,66.55 45.339,70.358 45.085,70.612 45.085,73.66 50.419,78.994 51.435,78.994 53.213,80.772 56.642,80.772 ; 56.896,80.772 56.642,80.772 ; U14.13@59.883,76.693 61.58,76.693 61.849,76.962 61.849,77.724 ; 61.849,77.089 61.849,77.724 ; 56.642,80.772 61.214,80.772 61.849,80.137 61.849,77.724
VS_MISO: U1.112 U14.30 | length 40.2
  Top Layer w0.254: 30.353,71.374 30.353,70.485 ; U1.112@31.119,69.301 30.353,70.067 30.353,70.485 ; v1@31.316,72.337 ccw(c30.883,71.904) 30.883,72.517 ccw(c30.883,73.13) v1@31.316,72.697 ; v1(31.496,72.517) 30.861,72.517 30.353,72.009 30.353,70.485 ; v1(51.435,72.517) 51.761,72.843 U14.30@53.033,72.843
  Bottom Layer w0.254: v1@31.242,72.517 cw(c30.629,72.517) 31.062,72.083 cw(c31.496,71.65) v1@31.496,72.263 ; v1(31.496,72.517) 30.988,72.009 30.988,68.834 31.496,68.326 33.147,68.326 ; 33.401,68.326 33.147,68.326 ; 36.449,69.215 35.687,69.215 ; v1@51.181,72.517 cw(c50.568,72.517) 51.001,72.083 cw(c51.435,71.65) v1@51.435,72.263 ; v1(51.435,72.517) 50.673,71.755 49.657,71.755 49.403,71.501 47.879,71.501 46.863,70.485 46.863,69.469 43.688,66.294 39.878,66.294 36.957,69.215 35.687,69.215 ; 33.147,68.326 34.29,68.326 35.179,69.215 35.687,69.215
VS_MOSI: U1.113 U14.29 | length 31.5
  Top Layer w0.254: U1.113@30.765,68.947 31.641,68.072 32.893,68.072 v1(33.909,69.088) ; v1@33.655,69.088 cw(c33.042,69.088) 33.475,68.654 cw(c33.909,68.221) v1@33.909,68.834 ; v1(50.546,72.771) 51.118,73.343 U14.29@53.033,73.343 ; v1@50.546,73.025 ccw(c50.546,73.638) 50.98,73.205 ccw(c51.413,72.771) v1@50.8,72.771
  Bottom Layer w0.254: v1(33.909,69.088) 34.442,69.621 37.313,69.621 40.132,66.802 43.434,66.802 46.355,69.723 46.355,70.612 47.752,72.009 49.276,72.009 49.53,72.263 50.038,72.263 v1(50.546,72.771) ; v1@33.909,69.342 ccw(c33.909,69.955) 34.343,69.522 ccw(c34.776,69.088) v1@34.163,69.088 ; v1@50.292,72.771 cw(c49.679,72.771) 50.112,72.337 cw(c50.546,71.904) v1@50.546,72.517
VS_RST: U1.100 U14.8 | length 40
  Top Layer w0.254: U1.100@38.544,67.533 40.132,69.122 40.132,71.247 44.45,75.565 46.228,75.565 50.165,79.502 51.181,79.502 52.705,81.026 ; 52.857,81.178 52.705,81.026 ; U14.8@61.233,73.343 62.548,73.343 62.865,73.66 62.865,75.946 62.357,76.454 62.357,80.391 61.468,81.28 52.959,81.28 52.705,81.026
VS_SCK: U1.111 U14.28 | length 30.3
  Top Layer w0.254: U1.111@31.472,69.654 32.293,68.834 32.639,68.834 33.782,69.977 v1(33.782,70.612) ; v1@33.602,70.432 cw(c33.169,69.999) 33.782,69.999 cw(c34.395,69.999) v1@33.962,70.432 ; v1@49.276,73.025 50.094,73.843 51.887,73.843 U14.28@53.033,73.843 ; v1@49.276,73.152 ccw(c49.276,73.459) 49.493,73.242 ; v1@49.53,72.898 cw(c50.45,72.898) 49.799,73.548
  Bottom Layer w0.254: v1(33.782,70.612) 34.163,70.231 37.465,70.231 40.386,67.31 43.18,67.31 45.847,69.977 45.847,70.739 47.879,72.771 49.022,72.771 v1@49.276,73.025 ; 48.356,72.771 ccw(c48.356,73.818) v1@49.096,73.078
  other v1: 49.276,72.898
VS_XDCS: U1.86 U14.3 | length 25.8
  Top Layer w0.254: U1.86@43.493,62.583 44.765,63.856 45.822,63.856 46.101,64.135 46.863,64.135 47.498,64.77 49.149,64.77 49.34,64.579 52.705,64.579 56.579,64.579 58.928,66.929 61.087,66.929 62.992,68.834 62.992,70.485 62.634,70.843 U14.3@61.233,70.843
pads on no net: J2.0 J4.6 J5.0 J6.0 J7.0 J8.0 J9.0 J11.1 J11.4 J11.5 J11.6 LCD1.0 LCD1.1 LCD1.2 LCD1.4 LCD1.6 LCD1.20 LCD1.30 U1.6 U1.122 U6.8 U7.8 U10.4 U14.1 U14.2 U14.9 U14.10 U14.11 U14.12 U14.15 U14.25 U14.27 U14.36 U14.39 U14.42 U14.48 USB1. Y1.3 Y1.4 Y2.3 Y2.4

## Polygon pours and split planes (outlines as drawn)
GND on Top Layer "Top Layer-No Net" (solid, remove dead copper, pour order 1000): 0.032,108.392 59.976,108.392 59.976,90.739 55.785,90.739 55.785,81.722 64.04,81.722 64.04,62.926 58.579,62.926 58.579,45.654 58.452,45.527 63.532,45.527 63.532,27.366 54.515,27.366 54.515,17.968 54.642,17.841 59.976,17.841 59.976,0.061 0.032,0.061 0.032,17.968 5.493,17.968 5.493,27.366 -3.524,27.366 -3.524,49.591 -3.397,49.718 -2.508,49.718 -2.508,81.722 4.35,81.722 4.35,90.612 4.223,90.739 0.032,90.739 0.032,108.392
GND on Bottom Layer "Top Layer-No Net" (solid, remove dead copper, pour order 1001): 0.021,108.686 60.092,108.686 60.092,91.033 59.965,90.906 55.774,90.906 55.774,81.889 64.029,81.889 64.029,63.22 63.902,63.093 58.568,63.093 58.568,45.694 63.521,45.694 63.521,27.533 54.631,27.533 54.631,18.008 60.092,18.008 60.092,0.228 0.021,0.228 0.021,18.008 0.148,18.135 5.482,18.135 5.482,27.533 -3.408,27.533 -3.408,49.758 -3.535,49.885 -2.519,49.885 -2.519,81.762 -2.392,81.889 4.212,81.889 4.212,90.652 4.339,90.779 4.212,90.906 0.021,90.906 0.021,108.559

## Keep-outs
Keep-Out Layer:
  circle w0.127: c14,91.25 r2.75
  circle w0.127: c30,91.25 r2.1
  circle w0.127: c46,91.25 r2.75
  circle w0.127: c46,16.2 r2.75
  circle w0.127: c35,16.2 r2.1
  circle w0.127: c14,16.2 r2.75
  lines w0.127: -3.532,28.805 ccw(c-2.032,28.805) -2.032,27.305 ; -3.5,48.85 -3.5,49.65 ; -2.54,80.264 cw(c-1.04,80.264) -1.04,81.764 ; 0,16.383 cw(c1.5,16.383) 1.5,17.883 ; 0,106.934 cw(c1.5,106.934) 1.5,108.434 ; 0.024,1.5 ccw(c1.524,1.5) 1.524,0 ; 0.024,92.178 ccw(c1.524,92.178) 1.524,90.678 ; 58.444,0.024 ccw(c58.444,1.524) 59.944,1.524 ; 58.547,17.907 cw(c58.547,16.407) 60.047,16.407 ; 58.571,108.434 cw(c58.571,106.934) 60.071,106.934 ; 62,27.329 ccw(c62,28.829) 63.5,28.829 ; 62.103,45.466 cw(c62.103,43.966) 63.603,43.966 ; 62.484,81.661 cw(c62.484,80.161) 63.984,80.161 ; 62.508,62.889 ccw(c62.508,64.389) 64.008,64.389 ; -3.5,49.65 -2.5,49.65 -2.5,81.65 4.25,81.65 4.25,90.65 0,90.65 0,108.4 60,108.4 60,90.65 55.75,90.65 55.75,81.65 64,81.65 64,62.95 58.5,62.95 58.5,45.45 63.5,45.45 63.5,27.35 54.55,27.35 54.55,17.85 60,17.85 60,0 0,0 0,17.85 5.45,17.85 5.45,27.35 -3.5,27.35 -3.5,49.65

## Silkscreen, mask and mechanical layers (free items; w line width, h text height)
Top Overlay:
  rectangle: 19.685,70.866 25.527,76.708
  text "EST V2.1" at 55.499,29.337 h1
  text "STU_Yw" at 57.277,28.194 h0.7
Bottom Overlay:
  circle w2: c50,76.1 r4
  circle w0.254: c46,16.2 r4
  circle w0.254: c14,16.2 r4
  circle w0.254: c14,91.25 r4
  circle w0.254: c46,91.25 r4
  circle w0.254: c30,91.25 r4
  circle w0.254: c35,16.2 r4
  rectangle: 5.207,56.134 10.287,58.674
  rectangle: 1.143,71.501 6.223,74.041

## Text inside footprints (layer, text, board x,y; h text height)
J5: Top Overlay "LEGO" at 12.199,0.806 h0.64 r180
J6: Top Overlay "LEGO" at 27.299,0.806 h0.64 r180
J7: Top Overlay "LEGO" at 42.499,0.806 h0.64 r180
J8: Top Overlay "LEGO" at 57.629,0.806 h0.64 r180